# EAGLE board PCB layout (EAGLE 9.7.0)
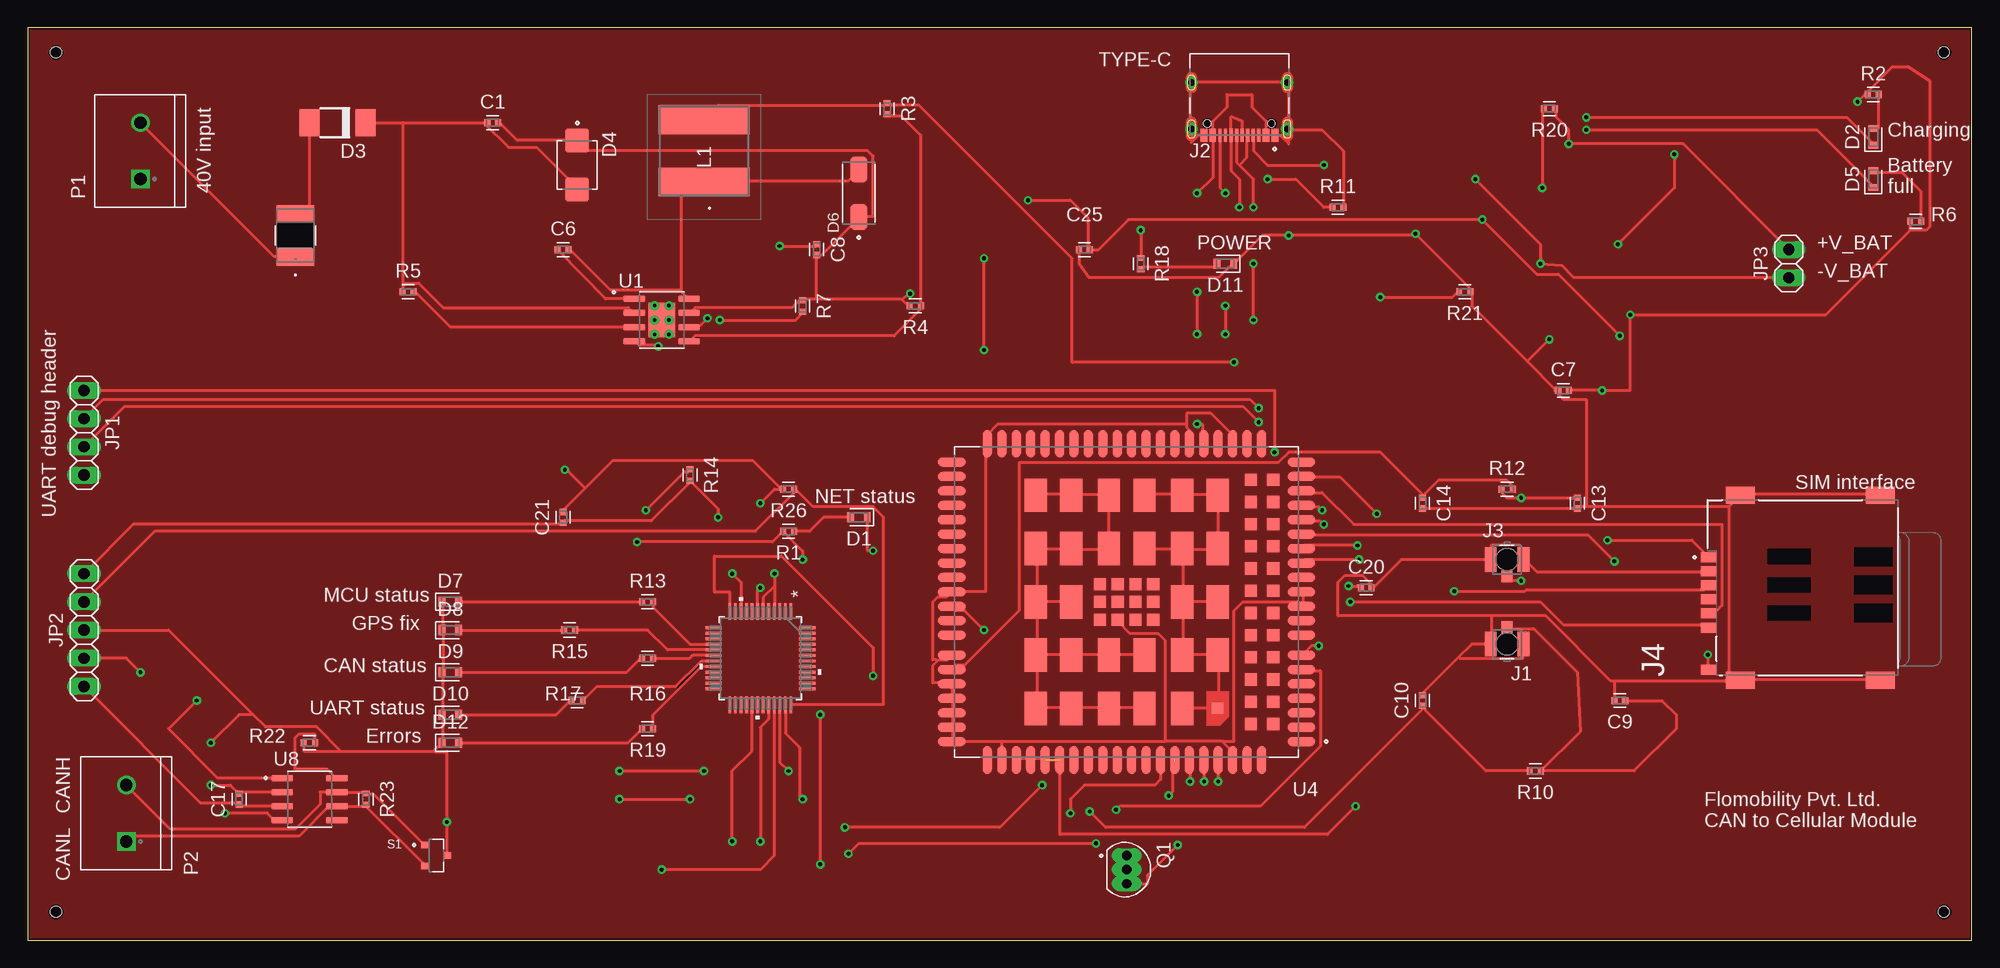
[diagram p0: board, top side]
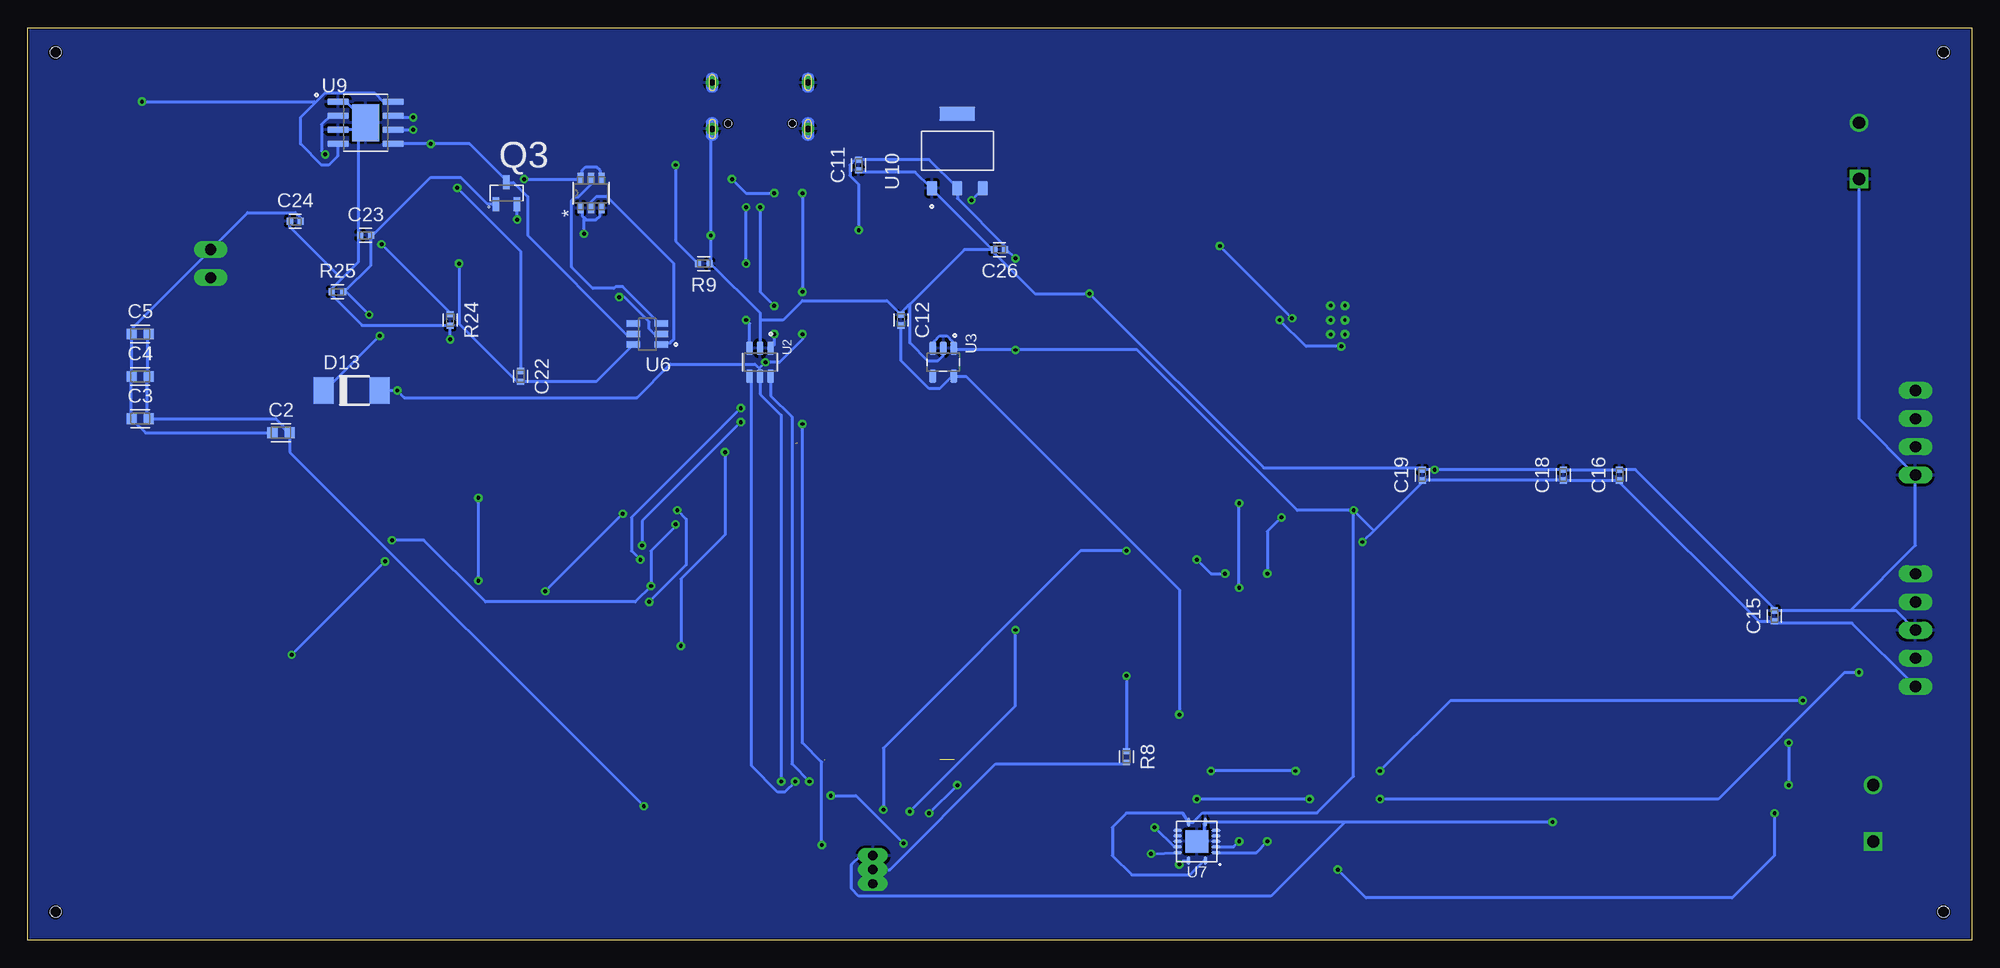
[diagram p1: board, bottom side, seen from below]

Size 175.24 x 82.22 mm. Coordinates in mm from the lower left corner, seen from the top.
Outline: 0,0 175.24,0 175.24,82.22 0,82.22 0,0
Copper layers (1*16): Top 0.035mm / dielectric 1.5mm / Bottom 0.035mm
Design rules "Fusion Electronics Design Rules": minimum track width 10mil, minimum drill 0.35mm, track to track 0mil, track to pad 0mil, pad to pad 6mil, via to via 6mil, smd to smd 6mil, copper to edge 6mil, drill to drill 6mil, minimum pad ring 10mil, minimum via ring 8mil, stop-mask expansion 4mil, vias tented up to drill 9999mil, thermal gap 10mil
Holes 1 mm at 2.54,80.01 2.54,2.54 172.72,2.54 172.72,80.01

## Footprints (pad centres in the part's own frame; a part is rotated, then mirrored left to right if it is on the bottom)
CAPC1005X60 = smd 0.56 x 0.629: 1 -0.485,0; 2 0.485,0
CAPC1608X85 = smd 0.921 x 0.97: 1 -0.775,0; 2 0.775,0
LEDC1608X65N_RND-G = smd 0.612 x 0.912: A 0.75,0; C -0.75,0
LEDC1608X65N_RND-R = smd 0.612 x 0.912: A 0.75,0; C -0.75,0
SS26 = smd 1.8 x 2.4: A 2.525,0; C -2.525,0
DIOM5436X261N = smd 2.18 x 2.12: 1 -2.215,0; 2 2.215,0
DIOM5226X240N = smd 2.33 x 1.55: A 2.135,0; C -2.135,0
FUSE_1812L05060_LTF = smd 1.549 x 3.404: 1 -1.943,0; 2 1.943,0
HIROSE_U.FL-R-SMT(10) = smd 1.05 x 2.2: G1 -1.475,0; G2 1.475,0 | smd 1 x 1.05: SIG 0,-1.525
SHOUHAN_TYPE-C_16PIN_2MD_(073) = smd 0.6 x 1.15: A1_B12 -3.2,3.67; A4_B9 -2.4,3.67; B1_A12 3.2,3.67; B4_A9 2.4,3.67 | smd 0.3 x 1.15: A5 -1.25,3.67; A6 -0.25,3.67; A7 0.25,3.67; A8 1.25,3.67; B5 1.75,3.67; B6 0.75,3.67; B7 -0.75,3.67; B8 -1.75,3.67 | drill 0.6 pad 1: SH1 -4.32,-1.075; SH2 4.32,-1.075; SH3 -4.32,3.105; SH4 4.32,3.105 | hole 0.65: -2.89,2.605; 2.89,2.605
GCT_SIM7100-6-1-15-00-A_REVC2 = smd 0.9 x 1.35: C1 2.765,8.52; C2 0.225,8.52; C3 -2.315,8.52; C5 1.495,8.52; C6 -1.045,8.52; C7 -3.585,8.52; CD -7.395,8.52 | smd 1.56 x 2.61: G1 -8.34,5.645; G2 8.34,5.645; G3 -8.34,-6.985; G4 8.34,-6.985
1X04 = drill 1.016 long: 1 -3.81,0; 2 -1.27,0; 3 1.27,0; 4 3.81,0
1X05 = drill 1.016 long: 1 -5.08,0; 2 -2.54,0; 3 0,0; 4 2.54,0; 5 5.08,0
1X02 = drill 1.016 long: 1 -1.27,0; 2 1.27,0
SRN8040100M = smd 2.6 x 8.2: 1 -2.8,0; 2 2.8,0
TE_282837-2 = drill 1.1 square: 1 -2.54,0 | drill 1.1: 2 2.54,0
TO92127P495H495-3 = drill 0.84 pad 1.04 long: 1 -1.27,0; 2 0,0; 3 1.27,0
SOT-23-6L_TCP = smd 0.978 x 0.559: 1 -1.34,0.95; 2 -1.34,0; 3 -1.34,-0.95; 4 1.34,-0.95; 5 1.34,0; 6 1.34,0.95
SOT95P230X110-3N = smd 0.59 x 1.26: 1 -0.95,-0.98; 2 0.95,-0.98; 3 0,0.98
RESC1005X40 = smd 0.535 x 0.644: 1 -0.507,0; 2 0.507,0
DIO_PESD2CAN,215 = smd 0.7 x 0.6: 1 -1,0.95; 2 -1,-0.95; 3 1,0
SOIC127P600X170-9N = smd 1.97 x 0.6: 1 -2.475,1.905; 2 -2.475,0.635; 3 -2.475,-0.635; 4 -2.475,-1.905; 5 2.475,-1.905; 6 2.475,-0.635; 7 2.475,0.635; 8 2.475,1.905 | smd 2.4 x 3.1: 9 0,0 | drill 0.3 pad 0.4: V1 -0.65,1.3; V2 0.65,1.3; V3 -0.65,0; V4 0.65,0; V5 -0.65,-1.3; V6 0.65,-1.3
SOT95P280X145-6N = smd 1.21 x 0.59: 1 -1.255,0.95; 2 -1.255,0; 3 -1.255,-0.95; 4 1.255,-0.95; 5 1.255,0; 6 1.255,0.95
SOT95P280X145-5N = smd 1.21 x 0.59: 1 -1.255,0.95; 2 -1.255,0; 3 -1.255,-0.95; 4 1.255,-0.95; 5 1.255,0.95
XCVR_EC200UCNAA-N05-SGNSA = smd 2.5 x 0.8: 1 -15.75,12.6; 2 -15.75,11.3; 3 -15.75,10; 4 -15.75,8.7; 5 -15.75,7.4; 6 -15.75,6.1; 7 -15.75,4.8; 8 -15.75,0.4; 9 -15.75,-0.9; 10 -15.75,-2.2; 11 -15.75,-3.5; 12 -15.75,-4.8; 13 -15.75,-6.1; 14 -15.75,-7.4; 15 -15.75,-8.7; 16 -15.75,-10; 17 -15.75,-11.3; 18 -15.75,-12.6; 37 15.75,-12.6; 38 15.75,-11.3; 39 15.75,-10; 40 15.75,-8.7; 41 15.75,-7.4; 42 15.75,-6.1; 43 15.75,-4.8; 44 15.75,-3.5; 45 15.75,-2.2; 46 15.75,-0.9; 47 15.75,0.4; 48 15.75,4.8; 49 15.75,6.1; 50 15.75,7.4; 51 15.75,8.7; 52 15.75,10; 53 15.75,11.3; 54 15.75,12.6; 141 -15.75,3; 142 -15.75,1.7; 143 15.75,1.7; 144 15.75,3 | smd 0.8 x 2.5: 19 -9.55,-14.25; 20 -8.25,-14.25; 21 -6.95,-14.25; 22 -5.65,-14.25; 23 -4.35,-14.25; 24 -3.05,-14.25; 25 -1.75,-14.25; 26 -0.45,-14.25; 27 0.85,-14.25; 28 2.15,-14.25; 29 3.45,-14.25; 30 4.75,-14.25; 31 6.05,-14.25; 32 7.35,-14.25; 33 8.65,-14.25; 34 9.95,-14.25; 35 11.25,-14.25; 36 12.55,-14.25; 55 12.55,14.25; 56 11.25,14.25; 57 9.95,14.25; 58 8.65,14.25; 59 7.35,14.25; 60 6.05,14.25; 61 4.75,14.25; 62 3.45,14.25; 63 2.15,14.25; 64 0.85,14.25; 65 -0.45,14.25; 66 -1.75,14.25; 67 -3.05,14.25; 68 -4.35,14.25; 69 -5.65,14.25; 70 -6.95,14.25; 71 -8.25,14.25; 72 -9.55,14.25; 113 -10.85,14.25; 114 -12.15,14.25; 115 -10.85,-14.25; 116 -12.15,-14.25 | smd 1.1 x 1.1: 73 2.4,1.6; 74 2.4,0; 75 2.4,-1.6; 76 0.8,1.6; 77 0.8,0; 78 0.8,-1.6; 79 -0.8,1.6; 80 -0.8,0; 81 -0.8,-1.6; 82 -2.4,1.6; 83 -2.4,0; 84 -2.4,-1.6; 117 -11.2,11; 118 -11.2,9; 119 -11.2,7; 120 -11.2,5; 121 -11.2,3; 122 -11.2,1; 123 -11.2,-1; 124 -11.2,-3; 125 -11.2,-5; 126 -11.2,-7; 127 -11.2,-9; 128 -11.2,-11; 129 -13.2,11; 130 -13.2,9; 131 -13.2,7; 132 -13.2,5; 133 -13.2,3; 134 -13.2,1; 135 -13.2,-1; 136 -13.2,-3; 137 -13.2,-5; 138 -13.2,-7; 139 -13.2,-9; 140 -13.2,-11 | smd 2 x 3: 85 8.2,9.6; 86 8.2,4.8; 87 8.2,0; 88 8.2,-4.8; 89 8.2,-9.6; 90 5,9.6; 91 5,4.8; 92 5,0; 93 5,-4.8; 94 5,-9.6; 95 1.6,9.6; 96 1.6,4.8; 97 1.6,-4.8; 98 1.6,-9.6; 99 -1.6,9.6; 100 -1.6,4.8; 101 -1.6,-4.8; 102 -1.6,-9.6; 103 -5,9.6; 104 -5,4.8; 105 -5,0; 106 -5,-4.8; 107 -5,-9.6; 109 -8.2,4.8; 110 -8.2,0; 111 -8.2,-4.8; 112 -8.2,-9.6 | smd 1 x 1: 108 -8.2,9.6
LQFP48_STM32G0B1CBT_STM = smd 1.473 x 0.254: 1 -4.216,2.751; 2 -4.216,2.251; 3 -4.216,1.75; 4 -4.216,1.25; 5 -4.216,0.75; 6 -4.216,0.25; 7 -4.216,-0.25; 8 -4.216,-0.75; 9 -4.216,-1.25; 10 -4.216,-1.75; 11 -4.216,-2.251; 12 -4.216,-2.751; 25 4.216,-2.751; 26 4.216,-2.251; 27 4.216,-1.75; 28 4.216,-1.25; 29 4.216,-0.75; 30 4.216,-0.25; 31 4.216,0.25; 32 4.216,0.75; 33 4.216,1.25; 34 4.216,1.75; 35 4.216,2.251; 36 4.216,2.751 | smd 0.254 x 1.473: 13 -2.751,-4.216; 14 -2.251,-4.216; 15 -1.75,-4.216; 16 -1.25,-4.216; 17 -0.75,-4.216; 18 -0.25,-4.216; 19 0.25,-4.216; 20 0.75,-4.216; 21 1.25,-4.216; 22 1.75,-4.216; 23 2.251,-4.216; 24 2.751,-4.216; 37 2.751,4.216; 38 2.251,4.216; 39 1.75,4.216; 40 1.25,4.216; 41 0.75,4.216; 42 0.25,4.216; 43 -0.25,4.216; 44 -0.75,4.216; 45 -1.25,4.216; 46 -1.75,4.216; 47 -2.251,4.216; 48 -2.751,4.216
S-PVQFN-N14 = smd 0.28 x 0.85: 1 -0.75,1.725; 7 -0.75,-1.725; 8 0.75,-1.725; 14 0.75,1.725 | smd 0.85 x 0.28: 2 -1.725,1; 3 -1.725,0.5; 4 -1.725,0; 5 -1.725,-0.5; 6 -1.725,-1; 9 1.725,-1; 10 1.725,-0.5; 11 1.725,0; 12 1.725,0.5; 13 1.725,1 | smd 2.05 x 2.05: THERMALPAD 0,0
SOIC127P599X175-8N = smd 1.97 x 0.6: 1 -2.47,1.905; 2 -2.47,0.635; 3 -2.47,-0.635; 4 -2.47,-1.905; 5 2.47,-1.905; 6 2.47,-0.635; 7 2.47,0.635; 8 2.47,1.905
SOP127P600X175-9N = smd 1.97 x 0.6: 1 -2.475,1.905; 2 -2.475,0.635; 3 -2.475,-0.635; 4 -2.475,-1.905; 5 2.475,-1.905; 6 2.475,-0.635; 7 2.475,0.635; 8 2.475,1.905 | smd 2.413 x 3.302: 9 0,0
SOT229P700X180-4N = smd 1.31 x 0.93: 1 -3.345,2.29; 2 -3.345,0; 3 -3.345,-2.29 | smd 1.31 x 3.24: 4 3.345,0

## Placement (x,y rotation side)
C1  10uF  [CAPC1005X60]  41.91,73.66 0 top
C2  100uF  [CAPC1608X85]  152.4,45.72 0 bottom
C3  100nf  [CAPC1608X85]  165.1,46.99 0 bottom
C4  33pF  [CAPC1608X85]  165.1,50.8 0 bottom
C5  10pF  [CAPC1608X85]  165.1,54.61 0 bottom
C6  0.1uF  [CAPC1005X60]  48.26,62.23 0 top
C7  22uF  [CAPC1005X60]  138.43,49.53 0 top
C8  0.01uF  [CAPC1005X60]  71.12,62.23 270 top
C9  NC  [CAPC1005X60]  143.51,21.59 180 top
C10  NC  [CAPC1005X60]  125.73,21.59 90 top
C11  1uF  [CAPC1005X60]  100.33,69.85 90 bottom
C12  2.2uF  [CAPC1005X60]  96.52,55.88 270 bottom
C13  NC  [CAPC1005X60]  139.7,39.37 270 top
C14  NC  [CAPC1005X60]  125.73,39.37 270 top
C15  100nF  [CAPC1005X60]  17.78,29.21 90 bottom
C16  100nF  [CAPC1005X60]  31.75,41.91 90 bottom
C17  100nF  [CAPC1005X60]  19.05,12.7 90 top
C18  100nF  [CAPC1005X60]  36.83,41.91 90 bottom
C19  4.7uF  [CAPC1005X60]  49.53,41.91 90 bottom
C20  100nF  [CAPC1005X60]  120.65,31.75 0 top
C21  100nF  [CAPC1005X60]  48.26,38.1 90 top
C22  0.1uF  [CAPC1005X60]  130.81,50.8 270 bottom
C23  10uF  [CAPC1005X60]  144.78,63.5 0 bottom
C24  10uF  [CAPC1005X60]  151.13,64.77 0 bottom
C25  10uF  [CAPC1005X60]  95.25,62.23 0 top
C26  10uF  [CAPC1005X60]  87.63,62.23 180 bottom
D1  CHIP-ROUND-G_0603  [LEDC1608X65N_RND-G]  74.93,38.1 180 top
D2  CHIP-ROUND-R_0603  [LEDC1608X65N_RND-R]  166.37,72.39 90 top
D3  SS26  [SS26]  27.94,73.66 180 top
D4  SMBJ48A  [DIOM5436X261N]  49.53,69.85 270 top
D5  CHIP-ROUND-G_0603  [LEDC1608X65N_RND-G]  166.37,68.58 90 top
D6  B340A-13-F  [DIOM5226X240N]  74.93,67.31 90 top
D7  CHIP-ROUND-G_0603  [LEDC1608X65N_RND-G]  38.1,30.48 0 top
D8  CHIP-ROUND-G_0603  [LEDC1608X65N_RND-G]  38.1,27.94 0 top
D9  CHIP-ROUND-G_0603  [LEDC1608X65N_RND-G]  38.1,24.13 0 top
D10  CHIP-ROUND-G_0603  [LEDC1608X65N_RND-G]  38.1,20.32 0 top
D11  CHIP-ROUND-G_0603  [LEDC1608X65N_RND-G]  107.95,60.96 180 top
D12  CHIP-ROUND-R_0603  [LEDC1608X65N_RND-R]  38.1,17.78 0 top
D13  SS26  [SS26]  146.05,49.53 0 bottom
F1  1812L050FUSE  [FUSE_1812L05060_LTF]  24.13,63.5 90 top
J1  U.FL-R-SMT(10)  [HIROSE_U.FL-R-SMT(10)]  133.35,26.67 180 top
J2  TYPE-C  [SHOUHAN_TYPE-C_16PIN_2MD_(073)]  109.22,76.2 180 top
J3  U.FL-R-SMT(10)  [HIROSE_U.FL-R-SMT(10)]  133.35,34.29 0 top
J4  SIM7100-6-1-15-00-A_REVC2  [GCT_SIM7100-6-1-15-00-A_REVC2]  160.02,31.75 90 top
JP1  PINHD-1X4  [1X04]  5.08,45.72 270 top
JP2  PINHD-1X5  [1X05]  5.08,27.94 90 top
JP3  PINHD-1X2  [1X02]  158.75,60.96 270 top
L1  SRN8040-100M  [SRN8040100M]  60.96,71.12 90 top
P1  282837-2  [TE_282837-2]  10.16,71.12 90 top
P2  282837-2  [TE_282837-2]  8.89,11.43 90 top
Q1  2N3904  [TO92127P495H495-3]  99.06,6.35 270 top
Q2  FS8205ASOT-23-6L_TCP  [SOT-23-6L_TCP]  124.46,67.31 90 bottom
Q3  PMV65XP,215  [SOT95P230X110-3N]  132.08,67.31 0 bottom
R1  1k  [RESC1005X40]  68.58,36.83 0 top
R2  1k  [RESC1005X40]  166.37,76.2 0 top
R3  68k  [RESC1005X40]  77.47,74.93 270 top
R4  12k  [RESC1005X40]  80.01,57.15 180 top
R5  100k  [RESC1005X40]  34.29,58.42 0 top
R6  1k  [RESC1005X40]  170.18,64.77 0 top
R7  100k  [RESC1005X40]  69.85,57.15 270 top
R8  10k  [RESC1005X40]  76.2,16.51 270 bottom
R9  5.1k  [RESC1005X40]  114.3,60.96 180 bottom
R10  0  [RESC1005X40]  135.89,15.24 180 top
R11  5.1k  [RESC1005X40]  118.11,66.04 0 top
R12  0  [RESC1005X40]  133.35,40.64 0 top
R13  1k  [RESC1005X40]  55.88,30.48 180 top
R14  10k  [RESC1005X40]  59.69,41.91 270 top
R15  1k  [RESC1005X40]  48.84,27.94 180 top
R16  1k  [RESC1005X40]  55.88,25.4 180 top
R17  1k  [RESC1005X40]  49.53,21.59 180 top
R18  1k  [RESC1005X40]  100.33,60.96 270 top
R19  1k  [RESC1005X40]  55.88,19.05 180 top
R20  100  [RESC1005X40]  137.16,74.93 180 top
R21  1k  [RESC1005X40]  129.54,58.42 180 top
R22  10k  [RESC1005X40]  25.4,17.78 0 top
R23  120  [RESC1005X40]  30.48,12.7 90 top
R24  1.2k  [RESC1005X40]  137.16,55.88 270 bottom
R25  100k  [RESC1005X40]  147.32,58.42 0 bottom
R26  10k  [RESC1005X40]  68.58,40.64 180 top
S1  PESD2CAN,215  [DIO_PESD2CAN,215]  36.83,7.62 0 top
U1  LMR14030SDDAR  [SOIC127P600X170-9N]  57.15,55.88 0 top
U2  USBLC6-2SC6  [SOT95P280X145-6N]  109.22,52.07 270 bottom
U3  TLV70218DBVR  [SOT95P280X145-5N]  92.71,52.07 270 bottom
U4  EC200UCNAA-N05-SGNSA  [XCVR_EC200UCNAA-N05-SGNSA]  99.06,30.48 180 top
U5  STM32G0B1CBT6LQFP48  [LQFP48_STM32G0B1CBT_STM]  66.04,25.4 270 top
U6  DW01A  [SOT95P280X145-6N]  119.38,54.61 180 bottom
U7  TXB0104RGY  [S-PVQFN-N14]  69.85,8.89 180 bottom
U8  SN65HVD230  [SOIC127P599X175-8N]  25.4,12.7 0 top
U9  TP4056  [SOP127P600X175-9N]  144.78,73.66 0 bottom
U10  AMS1117-3.3  [SOT229P700X180-4N]  91.44,71.12 90 bottom

## Library data of the parts
C1-C26 = Tinkercad; CATEGORY: Capacitor
D1 D5 D7-D11 = LED; CATEGORY: LED; COLOR: Green; DESCRIPTION: Green LED Indication 0603 (1608 Metric); PACKAGE_SIZE: 0603; PACKAGE_TYPE: Surface Mount; SUBCATEGORY: Chip LED; TYPE: Square with Domed Top
D2 D12 = LED; CATEGORY: LED; COLOR: Red; DESCRIPTION: Red LED Indication 0603 (1608 Metric); PACKAGE_SIZE: 0603; PACKAGE_TYPE: Surface Mount; SUBCATEGORY: Chip LED; TYPE: Square with Domed Top
D3 D13 = SS26; AVAILABILITY: In Stock; CHECK_PRICES: https://www.snapeda.com/parts/SS26/Onsemi/view-part/?ref=eda; DESCRIPTION: Schottkydiod 2 A 60 V DO-214AA%3DSMB | Vishay SS26 @ Schottkydioder (Schottkydiod 2 A 60 V DO-214AA%3DSMB Dioder / Småsignals Schottky-dioder); MF: ON Semiconductor; MP: SS26; PACKAGE: SMB-2 ON Semiconductor; PRICE: None; SNAPEDA_LINK: https://www.snapeda.com/parts/SS26/Onsemi/view-part/?ref=snap
D4 = SMBJ48A; AVAILABILITY: In Stock; CHECK_PRICES: https://www.snapeda.com/parts/SMBJ48A/Littelfuse/view-part/?ref=eda; DESCRIPTION: TVS Diode, 600W, 48V, -65 to 150 Operating Temp, Surface Mount, SMBJ Series | Littelfuse SMBJ48A; MF: Littelfuse; MP: SMBJ48A; PACKAGE: DO-214 Littelfuse; PRICE: None; SNAPEDA_LINK: https://www.snapeda.com/parts/SMBJ48A/Littelfuse/view-part/?ref=snap
D6 = B340A-13-F; AVAILABILITY: In Stock; CHECK_PRICES: https://www.snapeda.com/parts/B340A-13-F/Diodes+Inc./view-part/?ref=eda; DESCRIPTION: Schottky Diode 3A 40V 0.5Vf SMA | Diodes Inc B340A-13-F; MF: Diodes Inc.; MP: B340A-13-F; PACKAGE: DO-214 Diodes Inc.; PRICE: None; SNAPEDA_LINK: https://www.snapeda.com/parts/B340A-13-F/Diodes+Inc./view-part/?ref=snap
F1 = 1812L05060MR; COPYRIGHT: Copyright (C) 2026 Ultra Librarian. All rights reserved.; MANUFACTURER_NAME: Littelfuse Inc; MANUFACTURER_PART_NUMBER: 1812L050/60MR
J1 J3 = U.FL-R-SMT_10_; AVAILABILITY: In Stock; CHECK_PRICES: https://www.snapeda.com/parts/U.FL-R-SMT(10)/Hirose+Electric+Co+Ltd/view-part/?ref=eda; DESCRIPTION: U.FL (UMCC) Connector Receptacle, Male Pin 50 Ohms Surface Mount Solder; MF: Hirose Electric Co Ltd; MP: U.FL-R-SMT(10); PACKAGE: None; PRICE: None; SNAPEDA_LINK: https://www.snapeda.com/parts/U.FL-R-SMT(10)/Hirose+Electric+Co+Ltd/view-part/?ref=snap
J2 = TYPE-C_16PIN_2MD__073_; AVAILABILITY: Not in stock; CHECK_PRICES: https://www.snapeda.com/parts/TYPE-C%2016PIN%202MD%20(073)/Shouhan/view-part/?ref=eda; DESCRIPTION: DC-5V 5A Type C USB; MF: Shouhan; MP: TYPE-C 16PIN 2MD (073); PACKAGE: Package; PRICE: None; SNAPEDA_LINK: https://www.snapeda.com/parts/TYPE-C%2016PIN%202MD%20(073)/Shouhan/view-part/?ref=snap
J4 = SIM7100-6-1-15-00-A_REVC2; AVAILABILITY: In Stock; CHECK_PRICES: https://www.snapeda.com/parts/SIM7100-6-1-15-00-A/Global+Connector+Technology/view-part/?ref=eda; DESCRIPTION: 7 (6 + 1) Position Card Connector Micro SIM Surface Mount, Right Angle Gold; MF: Global Connector Technology; MP: SIM7100-6-1-15-00-A; PACKAGE: None; PRICE: None; SNAPEDA_LINK: https://www.snapeda.com/parts/SIM7100-6-1-15-00-A/Global+Connector+Technology/view-part/?ref=snap
JP1 = Connector; CATEGORY: Connectors; DESCRIPTION: Header-Straight-4 Position; PACKAGE_TYPE: Through Hole; PITCH: 0.100" (2.54mm); SUBCATEGORY: Headers; TYPE: Male Pins
JP2 = Connector; CATEGORY: Connectors; DESCRIPTION: Header-Straight-5 Position; PACKAGE_TYPE: Through Hole; PITCH: 0.100" (2.54mm); SUBCATEGORY: Headers; TYPE: Male Pins
JP3 = Connector; CATEGORY: Connectors; DESCRIPTION: Header-Straight-2 Position; PACKAGE_TYPE: Through Hole; PITCH: 0.100" (2.54mm); SUBCATEGORY: Headers; TYPE: Male Pins
L1 = SRN8040-100M; ARROW_PART_NUMBER: SRN8040-100M; ARROW_PRICE-STOCK: https://www.arrow.com/en/products/srn8040-100m/bourns?region=nac; DESCRIPTION: Bourns SRN8040 Series Type SMD Shielded Wire-wound SMD Inductor with a Ferrite Core, 10 uH +/-20% Semi-Shielded 3.1A Idc; HEIGHT: 4mm; MANUFACTURER_NAME: Bourns; MANUFACTURER_PART_NUMBER: SRN8040-100M; MOUSER_PART_NUMBER: 652-SRN8040-100M; MOUSER_PRICE-STOCK: https://www.mouser.co.uk/ProductDetail/Bourns/SRN8040-100M?qs=opBjA1TV901MvrktVUEKyA%3D%3D
P1 P2 = 282837-2; AVAILABILITY: In Stock; CHECK_PRICES: https://www.snapeda.com/parts/282837-2/TE+Connectivity+AMP+Connectors/view-part/?ref=eda; COMMENT: 282837-2; DESCRIPTION: Terminal Block Connector Wire Receptacle 2 5.08 mm 30-16 AWG Green 13.5 A 250 V | TE Connectivity 282837-2; MF: TE Connectivity; MP: 282837-2; PACKAGE: None; PRICE: None; SNAPEDA_LINK: https://www.snapeda.com/parts/282837-2/TE+Connectivity+AMP+Connectors/view-part/?ref=snap
Q1 = 2N3904; AVAILABILITY: Not in stock; CHECK_PRICES: https://www.snapeda.com/parts/2N3904/Onsemi/view-part/?ref=eda; DESCRIPTION: Trans GP BJT NPN 40V 0.2A 3-Pin SPT T/R Trans GP BJT NPN 40V 0.2A 3-Pin SPT T/R Trans GP BJT NPN 40V 0.2A 3-Pin SPT T/R; MF: MICROSS/On Semiconductor; MP: 2N3904; PACKAGE: E-PKG AXIAL-LEADED-2 ON Semiconductor; PRICE: None; SNAPEDA_LINK: https://www.snapeda.com/parts/2N3904/Onsemi/view-part/?ref=snap
Q2 = FS8205A; COPYRIGHT: Copyright (C) 2026 Ultra Librarian. All rights reserved.; MANUFACTURER_NAME: Tech Public; MANUFACTURER_PART_NUMBER: FS8205A
Q3 = PMV65XP_215; AVAILABILITY: In Stock; CHECK_PRICES: https://www.snapeda.com/parts/PMV65XP,215/Nexperia/view-part/?ref=eda; DESCRIPTION: P-Channel 20 V 2.8A (Ta) 480mW (Ta) Surface Mount TO-236AB; MF: Nexperia; MP: PMV65XP,215; PACKAGE: SOT23-3 Nexperia USA Inc.; PRICE: None; SNAPEDA_LINK: https://www.snapeda.com/parts/PMV65XP,215/Nexperia/view-part/?ref=snap
R1-R26 = Resistor; CATEGORY: Resistors; DESCRIPTION: Chip Resistor 1.05 X 0.54 X 0.40 mm body 0402(1005-METRIC) Package; PACKAGE_SIZE: 0402; PACKAGE_TYPE: Surface Mount
S1 = PESD2CAN_215; AVAILABILITY: In Stock; CHECK_PRICES: https://www.snapeda.com/parts/PESD2CAN,215/Nexperia/view-part/?ref=eda; DESCRIPTION: 41V Clamp 5A (8/20µs) Ipp Tvs Diode Surface Mount TO-236AB; MF: Nexperia USA; MP: PESD2CAN,215; PACKAGE: SOT23-3 Nexperia USA Inc.; PRICE: None; SNAPEDA_LINK: https://www.snapeda.com/parts/PESD2CAN,215/Nexperia/view-part/?ref=snap
U1 = LMR14030SDDAR (1); AVAILABILITY: In Stock; CHECK_PRICES: https://www.snapeda.com/parts/LMR14030SDDAR/Texas+Instruments/view-part/?ref=eda; DESCRIPTION: SIMPLE SWITCHER® 40-V, 3.5-A, 2.2-MHz step-down converter with 40-uA IQ; MF: Texas Instruments; MP: LMR14030SDDAR; PACKAGE: HSOIC-8 Texas Instruments; PRICE: None; SNAPEDA_LINK: https://www.snapeda.com/parts/LMR14030SDDAR/Texas+Instruments/view-part/?ref=snap
U2 = USBLC6-2SC6; AVAILABILITY: In Stock; CHECK_PRICES: https://www.snapeda.com/parts/USBLC6-2SC6/STMicroelectronics/view-part/?ref=eda; DESCRIPTION: 17V Clamp 5A (8/20µs) Ipp Tvs Diode Surface Mount SOT-23-6; MF: STMicroelectronics; MP: USBLC6-2SC6; PACKAGE: SOT-23-6 STMicroelectronics; PRICE: None; SNAPEDA_LINK: https://www.snapeda.com/parts/USBLC6-2SC6/STMicroelectronics/view-part/?ref=snap
U3 = TLV70218DBVR; AVAILABILITY: In Stock; CHECK_PRICES: https://www.snapeda.com/parts/TLV70218DBVR/Texas+Instruments/view-part/?ref=eda; DESCRIPTION: 300-mA, high-PSRR, low-IQ, low-dropout voltage regulator with enable; MF: Texas Instruments; MP: TLV70218DBVR; PACKAGE: SOT-23-5 Texas Instruments; PRICE: None; SNAPEDA_LINK: https://www.snapeda.com/parts/TLV70218DBVR/Texas+Instruments/view-part/?ref=snap
U4 = EC200UCNAA-N05-SGNSA; AVAILABILITY: In Stock; CHECK_PRICES: https://www.snapeda.com/parts/EC200UCNAA-N05-SGNSA/Quectel/view-part/?ref=eda; DESCRIPTION: Quectel 4G LTE Cat 1 wireless BT GNSS module; MF: Quectel; MP: EC200UCNAA-N05-SGNSA; PACKAGE: None; PRICE: None; SNAPEDA_LINK: https://www.snapeda.com/parts/EC200UCNAA-N05-SGNSA/Quectel/view-part/?ref=snap
U5 = stm32; COPYRIGHT: Copyright (C) 2026 Ultra Librarian. All rights reserved.; DATASHEET: https://www.st.com/resource/en/datasheet/stm32g0b1cc.pdf; DESCRIPTION: Mainstream Arm Cortex-M0+ 32-bit MCU, up to 128KB Flash, 144KB RAM, 6x USART, timers, ADC, DAC, comm. I/Fs, 1.7-3.6V; MANUFACTURER_NAME: STMicroelectronics; MANUFACTURER_PART_NUMBER: STM32G0B1CBT6
U6 = DW01A; AVAILABILITY: Not in stock; CHECK_PRICES: https://www.snapeda.com/parts/DW01A/Fortune+Semiconductor/view-part/?ref=eda; DESCRIPTION: One Cell Lithium-ion/Polymer Battery Protection IC; MF: Fortune Semiconductor; MP: DW01A; PACKAGE: SOT-23-6 Fortune Semiconductor; PRICE: None; SNAPEDA_LINK: https://www.snapeda.com/parts/DW01A/Fortune+Semiconductor/view-part/?ref=snap
U7 = TXB0104; AVAILABILITY: In Stock; CHECK_PRICES: https://www.snapeda.com/parts/TXB0104/Texas+Instruments/view-part/?ref=eda; DESCRIPTION: 4-BIT BIDIRECTIONAL VOLTAGE-LEVEL TRANSLATOR WITH AUTO DIRECTION SENSING AND ±15-kV ESD PROTECTION; MF: Texas Instruments; MP: TXB0104; PACKAGE: None; PRICE: None; SNAPEDA_LINK: https://www.snapeda.com/parts/TXB0104/Texas+Instruments/view-part/?ref=snap
U8 = SN65HVD230; AVAILABILITY: In Stock; CHECK_PRICES: https://www.snapeda.com/parts/SN65HVD230/Texas+Instruments/view-part/?ref=eda; DESCRIPTION: 1/1 Transceiver Half CANbus 8-SOIC; MF: Texas Instruments; MP: SN65HVD230; PACKAGE: SOIC-8 Texas Instruments; PRICE: None; SNAPEDA_LINK: https://www.snapeda.com/parts/SN65HVD230/Texas+Instruments/view-part/?ref=snap
U9 = TP4056; AVAILABILITY: Not in stock; CHECK_PRICES: https://www.snapeda.com/parts/TP4056/NanJing+Top+Power+ASIC+Corp./view-part/?ref=eda; DESCRIPTION: Complete single cell Li-Ion battery with a constant current / constant voltage linear charger; MF: NanJing Top Power ASIC Corp.; MP: TP4056; PACKAGE: Package; PRICE: None; SNAPEDA_LINK: https://www.snapeda.com/parts/TP4056/NanJing+Top+Power+ASIC+Corp./view-part/?ref=snap
U10 = AMS1117-3.3; AVAILABILITY: Not in stock; CHECK_PRICES: https://www.snapeda.com/parts/AMS1117-3.3/Advanced+Monolithic+Systems/view-part/?ref=eda; DESCRIPTION: Sot223/Pkg 1-Amp 3.3-Volt Low Drop Out Voltage Regulatator; MF: Advanced Monolithic Systems; MP: AMS1117-3.3; PACKAGE: SOT-223 Seeed Technology; PRICE: None; SNAPEDA_LINK: https://www.snapeda.com/parts/AMS1117-3.3/Advanced+Monolithic+Systems/view-part/?ref=snap

## Nets
+1.8V: C12.2 U3.5 U7.14
+3.3V: C11.2 C15.1 C16.1 C17.1 C18.1 C19.1 C26.1 JP2.1 R1.1 R14.1 R18.1 U3.1 U3.3 U5.4 U5.6 U7.1 U7.8 U8.3 U10.2
+5V: C7.2 C23.2 D13.A J2.A4_B9 J2.B4_A9 L1.2 Q3.1 R2.1 R3.1 R6.1 R25.2 U2.5 U4.71 U9.4 U9.8
+V_BAT: C2.1 C3.1 C4.1 C5.1 C24.2 JP3.1 Q3.3 R20.1 U6.5 U9.5
-V_BAT: C22.2 JP3.2 Q2.4 Q2.6 U6.6
ANT_GNSS: C10.1 R10.2 U4.47
ANT_MAIN: C14.1 R12.2 U4.49
CAN_RX: U5.33 U8.4
CAN_TX: U5.34 U8.1
CANH: P2.2 R23.2 S1.1 U8.7
CHRG: D2.C U9.7
DBG_RXD: JP1.2 U4.11
DBG_TXD: JP1.3 U4.12
EXP: U1.9 U1.V1 U1.V2 U1.V3 U1.V4 U1.V5 U1.V6
FB: R3.2 R4.1 U1.5
GND: C1.2 C7.1 C8.2 C9.2 C10.2 C11.1 C12.1 C13.2 C14.2 C15.2 C16.2 C17.2 C18.2 C19.2 C20.2 C21.2 C23.1 C24.1 C25.1 C26.2 D4.1 D6.C D7.C D8.C D9.C D10.C D11.C D12.C J1.G1 J1.G2 J2.A1_B12 J2.B1_A12 J2.SH1 J2.SH2 J2.SH3 J2.SH4 J3.G1 J3.G2 J4.C5 J4.G1 J4.G2 J4.G3 J4.G4 JP1.4 JP2.3 P1.1 Q1.1 Q2.1 Q2.3 R4.2 R7.1 R9.1 R11.2 R21.1 R22.1 R24.2 R25.1 R26.2 S1.3 U1.7 U2.2 U3.2 U5.7 U7.7 U7.THERMALPAD U8.2 U9.1 U9.3 U9.9 U10.1
GND_1: U4.8 U4.9 U4.19 U4.22 U4.36 U4.46 U4.48 U4.50 U4.51 U4.52 U4.53 U4.54 U4.56 U4.72 U4.76
GND_2: U4.85 U4.86 U4.87 U4.88 U4.89 U4.90 U4.91 U4.92 U4.93 U4.94 U4.95 U4.96 U4.97 U4.98 U4.99 U4.100
GND_3: U4.101 U4.102 U4.103 U4.104 U4.105 U4.106 U4.107 U4.108 U4.109 U4.110 U4.111 U4.112
MAIN_RXD: U4.68 U7.13
MAIN_TXD: U4.67 U7.12
N$1: Q1.2 R8.2
N$2: J2.A5 R9.2
N$3: J2.B5 R11.1
N$4: C9.1 J1.SIG R10.1
N$5: R24.1 U9.2
N$6: D2.A R2.2
N$7: D5.A R6.2
N$8: C13.1 J3.SIG R12.1
N$9: R22.2 U8.8
N$10: F1.1 P1.2
N$11: D3.A F1.2
N$12: C1.1 D3.C D4.2 R5.1 U1.2
N$13: C6.1 U1.1
N$14: C6.2 D6.A L1.1 U1.8
N$15: R5.2 U1.3
N$16: R7.2 U1.4
N$17: C8.1 U1.6
N$18: R21.2 U6.2
N$19: D11.A R18.2
N$20: C22.1 R20.2
N$21: P2.1 R23.1 S1.2 U8.6
N$22: D1.A R1.2
N$23: D7.A R13.2
N$24: D8.A R15.2
N$25: D9.A R16.2
N$26: D10.A R17.2
N$27: D12.A R19.2
NET_STATUS: D1.C U4.6
NRST: C21.1 JP2.5 R14.2 U5.10
OC_B: Q2.5 U6.3
OD_B: Q2.2 U6.1
PA1: R8.1 U5.12
PA5: R13.1 U5.16
PA6: R15.1 U5.17
PA7: R16.1 U5.18
PB0: R17.1 U5.19
PB1: R19.1 U5.20
PWRKEY: Q1.3 U4.21
RX: U5.32 U7.3
SDIO1_VDD: U4.34
STDBY: D5.C U9.6
SWCLK: JP2.4 R26.1 U5.36
SWDIO: JP2.2 U5.35
TX: U5.29 U7.2
USB_D+: J2.A6 J2.B6 U2.1
USB_D-: J2.A7 J2.B7 U2.3
USB_DM: U2.4 U4.70
USB_DP: U2.6 U4.69
USIM2_VDD: U4.128
USIM_CLK: J4.C3 U4.16
USIM_DATA: J4.C7 U4.15
USIM_DET: J4.CD U4.13
USIM_GND: U4.10
USIM_RST: J4.C2 U4.17
USIM_VDD: C20.1 J4.C1 U4.14
V_SYS: C25.2 D13.C Q3.2 U10.3
VBAT_BB: C2.2 C3.2 C4.2 C5.2 U4.57 U4.58 U4.59 U4.60
VDD_EXT: JP1.1 U4.7
VPP: J4.C6
VREF+: U5.5

## Tracks (layer width: path | path; a pad name or v marks a point on that pad's centre or on a via)
+1.8V  (via drill 0.35)
  Top 0.254: v71.44,20.32 v71.44,6.83
  Bottom 0.254: C12.2 96.52,52.23 93.98,49.69 93.03,49.69 91.92,50.8 U3.5 91.76,50.8 90.65,50.8 71.44,31.59 v71.44,20.32 | v71.44,6.83 71.12,7.14 70.64,7.14 U7.14
+3.3V  (via drill 0.35)
  Top 0.254: U8.3 19.05,12.07 C17.1 18.89,12.38 15.56,12.38 JP2.1 | v100.33,63.98 R18.1 | v54.93,35.88 67.12,35.88 R1.1 69.85,35.05 v69.85,34.29 | v55.72,38.74 59.21,42.23 59.53,42.23 59.69,42.39 R14.1 | v86.2,53.18 v86.2,61.44 | U5.4 67.31,29.64 v67.31,33.02 67.31,31.91 66.29,30.89 U5.6
  Bottom 0.254: JP2.1 10.79,28.57 17.78,28.57 C15.1 19.21,28.73 31.75,41.27 C16.1 C18.1 | C11.2 93.98,70.33 91.44,67.79 U10.2 91.44,66.83 87.15,62.55 C26.1 87,62.23 v86.2,61.44 | v100.33,63.98 100.33,68.1 101.12,68.9 101.12,69.85 100.65,70.33 C11.2 | C11.2 | U7.1 69.22,7.14 70.48,5.87 75.72,5.87 77.47,7.62 77.47,10.16 76.2,11.43 71.12,11.43 U7.8 70.19,10.62 69.34,11.47 59.01,11.47 55.72,14.76 v55.72,38.74 | U3.3 93.5,53.34 93.5,53.98 93.03,54.45 92.39,54.45 91.92,53.98 91.92,53.34 U3.1 91.76,53.18 v86.2,53.18 75.25,53.18 60.8,38.74 v55.72,38.74 | C18.1 C19.1 49.53,41.27 53.9,36.91 | C18.1 | 53.9,36.91 v54.93,35.88 | 53.9,36.91 v55.72,38.74 | v69.85,34.29 68.58,33.02 v67.31,33.02
+5V  (via drill 0.35)
  Top 0.254: 169.7,63.98 169.7,64.77 R6.1 | 169.7,63.98 171.13,63.98 171.45,64.29 171.45,77.43 169.5,78.71 168.09,78.71 165.89,76.52 165.89,76.2 R2.1 165.58,76.2 v164.94,75.56 | L1.2 60.96,73.98 62.23,75.25 77.31,75.25 77.47,75.41 R3.1 77.47,75.25 80.33,75.25 94.14,61.44 94.14,52.07 v108.74,52.07 | C7.2 v141.92,49.53 144.46,49.53 v144.46,56.36 162.08,56.36 169.7,63.98 | v107.31,14.29 107.31,16.19 U4.71 | J2.A4_B9 111.62,73.8 110.35,75.07 110.35,76.2 108.09,76.2 108.09,75.07 106.82,73.8 J2.B4_A9 106.82,68.72 v105.41,67.31 | v105.41,58.42 v105.41,54.61
  Bottom 0.254: U9.8 143.19,75.56 143.99,76.36 148.43,76.36 149.3,75.49 | 149.3,75.49 150.65,74.14 150.65,71.75 148.75,69.85 148.11,69.85 147.32,70.64 147.32,71.75 U9.4 | v164.94,75.56 149.38,75.56 149.3,75.49 | 146.61,58.5 146.69,58.42 R25.2 | 146.61,58.5 144.3,60.8 C23.2 144.15,63.5 138.91,68.74 136.21,68.74 133.83,66.36 133.03,66.36 Q3.1 | D13.A v141.92,49.53 141.29,48.9 120.33,48.9 117.32,51.91 109.7,51.91 109.3,51.51 | 109.3,51.51 109.22,51.44 U2.5 109.22,49.21 107.31,47.31 v107.31,14.29 | v144.46,56.36 146.61,58.5 | 109.3,51.51 v108.74,52.07 107.47,52.07 105.41,54.13 v105.41,54.61 | v105.41,67.31 v105.41,58.42
+V_BAT  (via drill 0.35)
  Top 0.254: JP3.1 149.22,71.75 v138.91,71.75 138.91,73.03 137.79,74.14 137.79,74.93 R20.1
  Bottom 0.254: U6.5 121.28,54.61 130.18,63.5 130.18,66.99 131.44,68.26 132.08,68.26 Q3.3 132.08,68.42 135.41,71.75 v138.91,71.75 U9.5 | 165.89,50.8 165.89,54.61 C5.1 165.74,54.61 165.74,55.24 JP3.1 155.42,65.56 151.13,65.56 150.65,65.09 C24.2 | C2.1 164.62,45.72 165.89,46.99 | 165.89,46.99 165.89,50.8 | 165.89,50.8 C4.1 | 165.89,46.99 C3.1
-V_BAT  (via drill 0.35)
  Top 0.254: v130.49,68.58 136.37,62.71 v136.37,60.96 138.27,60.8 139.38,59.69 JP3.2
  Bottom 0.254: C22.2 123.98,50.32 120.65,53.66 U6.6 | Q2.4 123.67,68.74 123.67,69.37 123.98,69.69 124.94,69.69 125.25,69.37 125.25,68.74 Q2.6 125.41,68.58 v130.49,68.58 | C22.2 131.13,50.32 136.37,55.56 v136.37,60.96 | C22.2
ANT_GNSS  (via drill 0.35)
  Top 0.254: 125.81,20.88 131.44,15.24 R10.2 | 125.81,20.88 125.73,20.96 C10.1 | v86.2,27.94 84.45,29.69 83.66,29.69 83.34,30 U4.47 | v95.73,11.59 97.16,10.16 115.09,10.16 125.81,20.88
  Bottom 0.254: v86.2,27.94 86.2,21.11 v95.73,11.59
ANT_MAIN
  Top 0.254: 125.81,40.08 127.16,41.43 133.35,41.43 133.83,40.96 133.83,40.64 R12.2 | 125.81,40.08 125.73,40.01 C14.1 | 125.81,40.08 121.92,43.97 113.67,43.97 112.71,43.02 89.38,43.02 89.38,29.69 84.45,24.77 83.66,24.77 83.34,24.45 U4.49
CAN_RX  (via drill 0.35)
  Top 0.254: U8.4 22.23,10.8 21.59,11.43 v17.78,11.43 | U5.33 67.29,7.6 66.04,6.35 v57.15,6.35
  Bottom 0.254: v17.78,11.43 17.78,7.62 21.59,3.81 54.61,3.81 v57.15,6.35
CAN_TX  (via drill 0.35)
  Top 0.254: U8.1 17.14,14.61 12.7,19.05 v15.24,21.59 | v53.34,15.24 v60.96,15.24 | U5.34 67.79,16.03 v68.58,15.24
  Bottom 0.254: v15.24,21.59 46.99,21.59 v53.34,15.24 | v60.96,15.24 v68.58,15.24
CANH
  Top 0.254: S1.1 35.72,8.57 31.11,13.18 30.48,13.18 R23.2 30.48,13.34 U8.7 26.35,13.34 26.35,12.22 24.13,10 12.86,10 P2.2
CHRG  (via drill 0.35)
  Top 0.254: v140.49,74.14 163.99,74.14 166.37,71.75 D2.C
  Bottom 0.254: v140.49,74.14 142.08,74.14 142.24,74.3 U9.7
DBG_RXD  (via drill 0.35)
  Top 0.254: v120.02,34.29 115.09,34.29 114.94,34.13 U4.11 | v110.97,47.94 110.17,48.74 6.83,48.74 JP1.2
  Bottom 0.254: v120.02,34.29 120.81,35.08 120.81,38.1 v110.97,47.94
DBG_TXD  (via drill 0.35)
  Top 0.254: v119.86,35.56 115.09,35.56 114.94,35.4 U4.12 | v110.97,46.67 109.54,48.1 8.73,48.1 JP1.3
  Bottom 0.254: v119.86,35.56 119.86,37.78 v110.97,46.67
EXP
  Top 0.254: 56.52,55.88 56.52,54.61 | 56.52,54.61 57.78,54.61 U1.V6 | 56.52,54.61 U1.V5 | 56.52,55.88 U1.V3 | 56.52,55.88 U1.9 | U1.9 U1.V4 | 57.78,57.31 56.52,57.31 U1.V1 | 57.78,57.31 U1.V2 | 57.78,57.31 U1.9
FB
  Top 0.254: 80.49,57.15 80.49,72.55 78.74,74.3 77.47,74.3 R3.2 | 80.49,57.15 80.49,56.83 78.11,54.45 60.17,54.45 59.69,53.98 U1.5 | 80.49,57.15 R4.1
GND  (via drill 0.35)
  Top 0.254: 37.47,27.94 37.47,24.13 | 37.47,27.94 37.47,30.48 D7.C | 37.47,27.94 D8.C | U8.2 19.05,13.34 C17.2 18.27,13.97 v16.51,13.97 | 28.26,16.99 36.51,16.99 36.59,17.07 | 28.26,16.99 24.92,16.99 24.92,17.78 R22.1 | 36.59,17.07 37.31,17.78 D12.C 37.47,17.78 37.47,20.32 | S1.3 37.78,7.62 v37.78,10.64 37.78,16.99 36.67,16.99 36.59,17.07 | 28.26,16.99 26.04,19.21 21.43,19.21 20.32,20.32 | 37.47,20.32 37.47,24.13 | 37.47,24.13 D9.C | 37.47,20.32 D10.C | 50.24,40.72 52.7,43.18 65.41,43.18 67.94,40.64 | 50.24,40.72 48.26,38.74 C21.2 | 67.94,40.64 R26.2 | 50.24,40.72 48.58,42.39 v48.42,42.39 | 20.32,20.32 12.7,27.94 JP2.3 | J4.C5 151.45,33.18 136.05,33.18 134.94,34.29 J3.G2 134.78,34.29 134.78,35.24 134.46,35.56 131.92,35.56 131.92,34.29 J3.G1 123.83,34.29 121.28,31.75 C20.2 121.28,31.91 120.33,32.86 118.75,32.86 118.11,32.23 118.11,29.21 131.92,29.21 | 128.98,25.48 130.18,26.67 J1.G2 131.92,26.67 131.92,29.21 | 128.98,25.48 125.73,22.23 C10.2 | J1.G1 134.78,26.67 134.78,25.4 129.06,25.4 128.98,25.48 | 143.03,23.34 C9.2 | 153.35,23.34 154.31,23.34 J4.G1 | 153.35,23.34 143.03,23.34 | J4.G3 167,23.5 154.46,23.5 J4.G1 | 131.92,29.21 136.84,29.21 142.72,23.34 143.03,23.34 | C1.2 42.55,73.66 44.13,72.07 D4.1 49.53,71.91 50.32,71.12 75.72,71.12 76.2,70.64 76.2,65.25 74.93,65.25 D6.C 74.93,65.09 71.6,61.75 C8.2 71.12,57.79 | 71.12,57.79 69.85,57.79 R7.1 69.85,57.63 69.53,57.63 68.9,56.99 60.17,56.99 59.69,56.52 U1.7 | 78.82,57.71 78.74,57.79 71.12,57.79 | 78.82,57.71 79.38,57.15 R4.2 | 113.67,73.03 116.68,73.03 118.59,71.12 118.59,66.04 R11.2 | 113.67,73.03 J2.SH3 113.67,73.18 113.67,77.15 J2.SH1 113.51,77.31 104.93,77.31 J2.SH2 104.78,77.15 104.78,73.18 J2.SH4 104.9,71.88 105.55,72.53 J2.B1_A12
  Top 0.254: C13.2 C14.2 | J4.G4 167,40.16 154.46,40.16 J4.G2 154.31,40.01 153.35,39.05 | C13.2 139.86,39.05 140.49,39.05 | 153.35,39.05 140.49,39.05 | C13.2 | 135.18,52.15 130.18,57.15 130.18,58.42 R21.1 130.02,58.42 130.02,58.74 v125.09,63.66 125.09,63.5 v113.67,63.5 111.28,63.5 108.74,60.96 D11.C 108.58,60.96 107.31,59.69 95.65,59.69 94.77,60.97 C25.1 | 135.18,52.15 137.72,49.61 | 137.72,49.61 137.79,49.53 C7.1 | 135.18,52.15 v137.16,54.13 | 140.49,39.05 140.49,48.74 138.43,48.74 137.64,49.53 137.72,49.61 | 78.82,57.71 79.38,58.26 v79.53,58.26 | 153.35,39.05 153.35,23.34 | 153.35,23.34 J4.G1 | U5.7 65.79,31.5 v66.04,31.75 | v66.04,39.37 67.31,40.64 67.94,40.64 | J2.A1_B12 112.89,72.53 113.67,71.75 113.67,73.03 | 20.32,20.32 19.05,20.32 v16.51,17.78
  Bottom 0.254: U7.THERMALPAD 69.22,9.53 69.22,10.48 U7.7 69.06,10.64 56.52,10.64 | Q1.1 100.17,7.62 100.97,6.83 100.97,4.6 100.33,3.97 63.18,3.97 56.52,10.64 | C18.2 C16.2 | C18.2 v48.42,42.39 C19.2 49.53,42.55 63.82,42.55 v79.53,58.26 84.45,58.26 88.42,62.23 88.34,62.31 | C18.2 | 10.95,29.69 6.83,29.69 JP2.3 | 10.95,29.69 C15.2 17.78,29.85 30.32,42.39 C16.2 | 10.95,29.69 5.08,35.56 JP1.4 10.16,46.99 P1.1 | C16.2 | 88.34,62.31 93.66,67.63 U10.1 93.82,67.79 95.25,69.22 100.33,69.22 C11.1 | 88.34,62.31 88.27,62.23 C26.2 90.81,62.23 95.73,57.31 | U3.2 92.71,52.71 93.19,52.23 94.14,52.23 95.73,53.82 95.73,57.15 | 113.67,60.96 v113.67,63.5 113.67,73.03 J2.SH3 | 109.22,55.88 109.22,56.52 113.67,60.96 | 109.22,55.88 U2.2 | 113.67,60.96 R9.1 | 145.41,73.03 U9.3 | U9.1 146.53,75.56 144.94,73.98 144.94,73.66 U9.9 145.41,73.03 | 145.41,63.5 145.41,61.12 146.92,59.61 | 146.92,59.61 147.8,58.74 147.8,58.42 | 146.92,59.61 151.61,64.29 C24.1 | 147.8,58.42 147.8,58.1 145.1,55.4 137.16,55.4 R24.2 v137.16,54.13 | 147.8,58.42 R25.1 | 145.41,63.5 145.41,73.03 | 145.41,63.5 C23.1 | 125.02,65.01 125.25,65.25 125.25,65.88 Q2.1 | 125.02,65.01 124.94,64.93 123.98,64.93 123.67,65.25 123.67,65.88 Q2.3 | v125.09,63.66 125.09,64.93 125.02,65.01 | v37.78,10.64 56.52,10.64 | v66.04,31.75 v66.04,39.37 | v16.51,17.78 v16.51,13.97 | 95.73,57.15 95.73,57.31 | 95.89,57.15 95.73,57.31 | 95.73,57.15 95.89,57.15 | 95.89,57.15 96.52,56.52 C12.1 97.79,57.63 105.41,57.63 107.17,55.88 109.22,55.88
  pour Top (no thermals): 0.08,0.08 175.18,0.08 175.18,82.47 0.08,82.47
  pour Bottom: 0.08,0.08 175.18,0.08 175.18,82.47 0.08,82.47
GND_1
  Top 0.254: U4.9 114.94,31.27 114.94,30.16 U4.8 114.78,30.16 114.46,30.48 109.54,30.48 108.74,29.69 108.74,17.94 107.79,17.94 107.71,17.86 | 102.55,17.94 102.55,26.99 101.92,27.62 99.38,27.62 98.27,28.73 U4.76 | 102.55,17.94 107.63,17.94 107.71,17.86 | 107.71,17.86 108.58,16.99 108.58,16.35 U4.72 | 83.34,17.94 83.34,19.05 U4.53 83.34,19.21 83.34,20.48 U4.52 83.34,20.64 83.34,21.75 U4.51 83.34,21.91 83.34,23.02 U4.50 83.19,23.18 81.6,23.18 81.6,24.77 81.99,25.16 | 87.79,17.94 87.79,16.35 U4.56 | 83.34,17.94 87.79,17.94 | 83.34,17.94 U4.54 | 104.46,46.51 104.46,47.47 106.68,47.47 108.58,45.56 108.58,44.77 U4.19 | 104.46,46.51 104.46,46.2 104.62,46.04 104.62,44.77 U4.22 | 81.99,25.16 82.07,25.24 82.87,25.24 83.19,25.56 U4.48 | 81.99,25.16 81.92,25.24 81.6,25.24 81.6,30.48 82.07,30.96 82.87,30.96 83.19,31.27 U4.46 83.34,31.43 86.36,31.43 86.36,44.61 U4.36 86.52,44.77 86.52,45.56 87.47,46.51 104.46,46.51 | 87.79,17.94 102.55,17.94
GND_2
  Top 0.254: 90.96,20.96 93.98,20.96 U4.90 94.14,20.96 97.31,20.96 U4.95 97.47,20.96 100.65,20.96 U4.99 | 90.96,25.72 93.98,25.72 U4.91 94.14,25.72 97.31,25.72 U4.96 97.47,25.72 100.65,25.72 U4.100 | 90.96,20.96 90.96,25.56 U4.86 90.96,25.72 | 90.96,20.96 U4.85 | U4.89 90.96,40.16 93.98,40.16 U4.94 94.14,40.16 97.31,40.16 U4.98 97.47,40.01 97.47,35.4 U4.97 97.31,35.24 94.14,35.24 U4.93 93.98,35.24 90.96,35.24 | U4.92 90.96,30.48 | 90.96,35.24 90.96,30.48 | 90.96,35.24 U4.88 | 90.96,30.48 90.96,25.72 | 90.96,30.48 U4.87
GND_3
  Top 0.254: U4.103 104.14,20.96 107.16,20.96 U4.108 107.31,20.96 107.31,25.56 U4.109 107.16,25.72 104.14,25.72 | U4.102 100.81,40.16 103.98,40.16 U4.107 104.14,40.16 107.16,40.16 U4.112 107.31,40.01 107.31,35.4 U4.111 107.16,35.24 104.14,35.24 | U4.110 104.14,30.48 | U4.101 100.81,35.24 103.98,35.24 U4.106 104.14,35.24 | 104.14,35.24 104.14,30.48 | 104.14,30.48 104.14,25.72 | 104.14,25.72 U4.104 | 104.14,30.48 U4.105
MAIN_RXD  (via drill 0.35)  (1 unrouted)
  Top 0.254: 103.35,16.19 103.19,16.03 103.19,13.35 v102.85,13.02 | v73.98,7.78 74.91,8.72 v96.29,8.72
  Bottom 0.254: v102.85,13.02 100.59,13.02 v96.29,8.72 | v73.98,7.78 U7.13
MAIN_TXD  (via drill 0.35)
  Top 0.254: U4.67 102.11,14.48 101.6,13.97 95.25,13.97 93.98,12.7 v93.98,11.43 | v91.44,13.97 87.63,10.16 v73.66,10.16
  Bottom 0.254: v93.98,11.43 v91.44,13.97 | v73.66,10.16 71.89,8.39 U7.12
N$1
  Bottom 0.254: R8.2 76.2,15.88 87.99,15.88 97.51,6.35 Q1.2
N$2  (via drill 0.35)
  Top 0.254: J2.A5 110.49,72.51 110.49,71.12 111.76,69.85 v116.84,69.85
  Bottom 0.254: v116.84,69.85 116.84,62.99 R9.2
N$3  (via drill 0.35)
  Top 0.254: J2.B5 107.47,67.79 v107.95,67.31 | v111.76,68.58 114.3,68.58 116.84,66.04 R11.1
  Bottom 0.254: v111.76,68.58 110.49,67.31 v107.95,67.31
N$4
  Top 0.254: J1.SIG 133.48,28.07 135.76,28.07 139.7,24.13 139.95,18.8 R10.1 144.78,15.24 148.59,19.05 148.59,20.32 147.32,21.59 C9.1
N$5  (via drill 0.35)
  Top 0.254: v143.35,62.71 148.43,67.79 v148.43,70.8
  Bottom 0.254: v143.35,62.71 137.16,56.52 R24.1 | v148.43,70.8 148.75,71.12 148.75,73.5 147.96,74.3 U9.2
N$6
  Top 0.254: R2.2 166.85,76.2 166.85,73.18 166.37,73.18 D2.A
N$7
  Top 0.254: R6.2 170.66,64.77 170.66,67.47 168.91,69.22 166.37,69.22 D5.A
N$8  (via drill 0.35)
  Top 0.254: C13.1 v134.62,39.85 133.35,39.85 132.87,40.32 132.87,40.64 R12.1 | v134.62,32.38 133.67,32.38 133.35,32.7 J3.SIG
  Bottom 0.254: v134.62,39.85 v134.62,32.38
N$9
  Top 0.254: R22.2 25.88,17.78 25.88,18.57 24.45,18.57 24.13,18.26 24.13,15.4 26.99,15.4 27.78,14.61 U8.8
N$10
  Top 0.254: P1.2 22.23,61.6 24.13,61.6 F1.1
N$11
  Top 0.254: D3.A 25.4,73.66 25.4,65.56 24.13,65.56 F1.2
N$12
  Top 0.254: D3.C 33.81,73.66 | 33.81,73.66 41.12,73.66 | 41.12,73.66 C1.1 | 33.81,73.66 33.81,59.21 | 33.81,59.21 33.81,58.42 R5.1 | 33.81,59.21 35.24,59.21 37.47,56.99 54.13,56.99 54.61,56.52 U1.2 | 41.12,73.66 43.34,71.44 45.88,71.44 49.53,67.79 D4.2
N$13
  Top 0.254: U1.1 52.07,57.79 C6.1
N$14
  Top 0.254: 58.82,58.5 59.53,57.79 U1.8 | 58.82,58.5 58.74,58.58 52.55,58.58 48.9,62.23 C6.2 | D6.A 74.93,69.37 73.98,68.42 60.96,68.42 L1.1 60.96,68.26 58.9,68.26 58.9,58.58 58.82,58.5
N$15
  Top 0.254: U1.3 38.1,55.24 34.92,58.42 R5.2
N$16  (via drill 0.35)
  Top 0.254: v62.39,55.88 69.22,55.88 69.85,56.52 R7.2 | v56.83,53.5 56.67,53.66 55.09,53.66 54.77,53.98 U1.4
  Bottom 0.254: v62.39,55.88 60.01,53.5 v56.83,53.5
N$17  (via drill 0.35)
  Top 0.254: v67.79,62.55 70.96,62.55 C8.1 | v61.28,56.04 60.48,55.24 U1.6
  Bottom 0.254: v61.28,56.04 v67.79,62.55
N$18  (via drill 0.35)
  Top 0.254: v121.92,57.94 128.43,57.94 128.91,58.42 R21.2
  Bottom 0.254: v121.92,57.94 121.44,57.94 119.22,55.72 119.22,55.09 118.75,54.61 U6.2
N$19
  Top 0.254: R18.2 100.33,60.48 100.49,60.64 106.84,60.64 107.16,60.96 D11.A
N$20  (via drill 0.35)
  Top 0.254: v136.53,67.79 136.53,74.93 R20.2
  Bottom 0.254: C22.1 130.81,62.07 v136.53,67.79
N$21
  Top 0.254: 30.48,12.07 U8.6 27.15,12.07 24.45,9.37 9.37,9.37 P2.1 | 30.48,12.07 35.72,6.83 S1.2 | 30.48,12.07 R23.1
N$22
  Top 0.254: D1.A 71.75,38.1 70.48,36.83 R1.2
N$23
  Top 0.254: D7.A R13.2
N$24
  Top 0.254: D8.A R15.2
N$25
  Top 0.254: D9.A 53.98,24.13 55.24,25.4 R16.2
N$26
  Top 0.254: D10.A 47.62,20.32 48.9,21.59 R17.2
N$27
  Top 0.254: D12.A 54.1,17.78 R19.2
NET_STATUS  (via drill 0.35)
  Top 0.254: v76.2,35.08 75.72,35.08 75.72,38.1 D1.C | v98.11,11.75 98.42,12.07 111.12,12.07 116.52,17.46 116.52,24.29 114.94,24.29 U4.6
  Bottom 0.254: v76.2,35.08 80.33,35.08 98.11,17.3 v98.11,11.75
NRST  (via drill 0.35)
  Top 0.254: JP2.5 9.53,37.46 48.26,37.46 C21.1 48.42,37.78 56.2,37.78 59.69,41.27 R14.2 62.23,38.86 v62.23,38.1 | v63.5,33.02 64.29,32.23 U5.10
  Bottom 0.254: v62.23,38.1 63.5,36.83 v63.5,33.02
OC_B
  Bottom 0.254: Q2.5 124.46,68.1 125.57,66.99 125.89,66.99 126.21,66.68 126.21,60.64 124.3,58.74 122.4,58.74 122.24,58.9 121.6,58.9 118.27,55.56 U6.3
OD_B
  Bottom 0.254: Q2.2 124.46,66.52 123.98,66.99 123.03,66.99 117,60.96 117,54.13 117.32,53.82 118.11,53.82 U6.1
PA1  (via drill 0.35)
  Top 0.254: v76.2,23.81 76.2,26.35 67.94,34.61 61.91,34.61 61.91,31.35 63.29,31.35 U5.12
  Bottom 0.254: v76.2,23.81 R8.1
PA5
  Top 0.254: R13.1 56.39,29.97 59.71,26.65 U5.16
PA6
  Top 0.254: U5.17 57.67,26.15 55.88,27.94 R15.1
PA7
  Top 0.254: R16.1 59.69,25.4 59.94,25.65 U5.18
PB0
  Top 0.254: R17.1 51.31,22.86 58.42,22.86 60.71,25.15 U5.19
PB1
  Top 0.254: R19.1 56.39,20.32 60.72,24.65 U5.20
PWRKEY  (via drill 0.35)  (1 unrouted)
  Top 0.254: 105.89,44.77 105.89,46.51 v105.41,46.51 | v103.66,8.57 100.97,5.87 100.97,5.08 Q1.3
  Bottom 0.254: v105.41,46.51 105.41,17.78 103.66,16.03 v103.66,8.57
RX  (via drill 0.35)
  Top 0.254: U5.32 66.79,19.91 66.04,19.16 v66.04,8.89
  Bottom 0.254: U7.3 66.54,8.39 v66.04,8.89
STDBY  (via drill 0.35)
  Top 0.254: v140.49,73.03 161.29,73.03 166.37,67.94 D5.C
  Bottom 0.254: U9.6 v140.49,73.03
SWCLK
  Top 0.254: U5.36 68.9,21.27 77.15,21.27 77.15,38.1 76.2,39.05 70.8,39.05 69.22,40.64 R26.1 68.98,40.24 | JP2.4 11.43,36.83 65.56,36.83 68.98,40.24 | 69.22,40.48 68.98,40.24
SWDIO  (via drill 0.35)
  Top 0.254: U5.35 68.29,18.64 69.56,17.37 69.56,12.99 v69.85,12.7 | v10.16,24.13 8.89,25.4 JP2.2 | v53.34,12.7 v59.69,12.7
  Bottom 0.254: v10.16,24.13 11.43,24.13 22.86,12.7 v53.34,12.7 | v59.69,12.7 v69.85,12.7
TX  (via drill 0.35)
  Top 0.254: v63.5,8.89 63.5,15.24 65.29,17.03 U5.29
  Bottom 0.254: U7.2 64.5,7.89 v63.5,8.89
USB_D+  (via drill 0.35)
  Top 0.254: J2.A6 109.47,73.8 108.47,74.18 J2.B6 108.47,69.33 109.22,68.58 v109.22,66.04 | v107.95,57.15 v107.95,54.61
  Bottom 0.254: v109.22,66.04 109.22,58.42 v107.95,57.15 | v107.95,54.61 107.95,53.65 U2.1
USB_D-  (via drill 0.35)
  Top 0.254: J2.A7 108.97,70.1 109.22,69.85 | 109.22,69.85 109.86,70.49 109.86,72.41 J2.B7 | v110.49,55.88 v110.49,60.96 | v110.49,66.04 110.49,68.58 109.22,69.85
  Bottom 0.254: U2.3 110.17,55.56 v110.49,55.88 | v110.49,60.96 v110.49,66.04
USB_DM  (via drill 0.35)
  Top 0.254: v106.05,14.29 106.05,16.19 U4.70
  Bottom 0.254: v106.05,14.29 107,13.34 107.63,13.34 110.01,15.72 110.01,50.8 U2.4
USB_DP  (via drill 0.35)
  Top 0.254: v104.78,14.29 104.78,16.19 U4.69
  Bottom 0.254: v104.78,14.29 106.36,15.88 106.36,47.15 108.27,49.05 108.27,50.8 U2.6
USIM_CLK
  Top 0.254: J4.C3 151.61,29.53 151.76,29.69 152.24,29.69 152.72,30.16 152.72,37.46 119.54,37.46 116.68,40.32 114.94,40.32 U4.16
USIM_DATA  (via drill 0.35)
  Top 0.254: v119.22,30.48 136.37,30.48 138.43,28.42 151.29,28.42 151.45,28.26 J4.C7 | v116.68,38.74 116.36,39.05 114.94,39.05 U4.15
  Bottom 0.254: v119.22,30.48 115.89,33.81 115.89,37.94 v116.68,38.74
USIM_DET  (via drill 0.35)
  Top 0.254: v151.45,25.72 151.45,24.45 J4.CD | v143.03,34.13 140.65,36.51 114.94,36.51 U4.13
  Bottom 0.254: v143.03,34.13 v151.45,25.72
USIM_RST  (via drill 0.35)
  Top 0.254: v128.59,31.43 134.94,31.43 135.1,31.59 151.13,31.59 151.45,31.91 J4.C2 | v121.6,38.42 118.27,41.75 114.94,41.75 U4.17
  Bottom 0.254: v121.6,38.42 v128.59,31.43
USIM_VDD  (via drill 0.35)
  Top 0.254: v119.06,31.91 119.86,31.91 120.02,31.75 C20.1 | v116.84,37.46 116.52,37.78 114.94,37.78 U4.14 | v142.4,36.04 150.02,36.04 151.45,34.61 J4.C1
  Bottom 0.254: v116.84,37.46 116.84,37.31 119.06,35.08 v119.06,31.91 120.49,30.48 133.99,30.48 139.54,36.04 v142.4,36.04
V_SYS  (via drill 0.35)
  Top 0.254: v90.17,66.68 93.98,66.68 95.57,65.09 95.57,62.39 C25.2 96.52,62.23 99.22,64.93 v131.13,64.93 136.05,60.01 137.95,60.01 v143.51,54.45
  Bottom 0.254: v90.17,66.68 89.22,67.63 U10.3 | v131.13,64.93 131.13,66.2 Q3.2 | v143.51,54.45 148.43,49.53 D13.C
VBAT_BB  (via drill 0.35)  (1 unrouted)
  Top 0.254: U4.57 89.22,16.35 90.33,16.35 U4.58 90.49,16.35 91.6,16.35 U4.59 93.03,16.19 93.03,9.53 117.16,9.53 v119.7,12.07
  Bottom 0.254: 164.47,50.8 164.47,54.61 C5.2 | 164.47,50.8 164.47,46.99 C3.2 152.88,46.99 152.24,46.35 152.24,46.2 151.76,45.72 C2.2 151.61,45.72 151.61,43.97 v119.7,12.07 | 164.47,50.8 C4.2
VDD_EXT  (via drill 0.35)
  Top 0.254: v116.36,26.51 115.73,26.51 114.94,25.72 U4.7 | v112.39,43.97 112.39,49.53 JP1.1
  Bottom 0.254: v116.36,26.51 116.36,32.54 112.39,36.51 v112.39,43.97

## Text on the board
tPlace: TYPE-C | Charging | 40V input | Battery / full | POWER | +V_BAT | -V_BAT | SIM interface | NET status | UART debug header | MCU status | GPS fix | CAN status | UART status | Errors | CANH | CANL | Flomobility Pvt. Ltd. / CAN to Cellular Module